# Altium PCB HighPower.PcbDoc
Units mil, origin at the board's own origin, x right, y up, seen from the top; angles counter-clockwise.
Board outline 2350.88 x 4143.89 mil, 2 copper layers (Top Layer, Bottom Layer); 8 components, 8 nets, 26 pads, 3 vias.
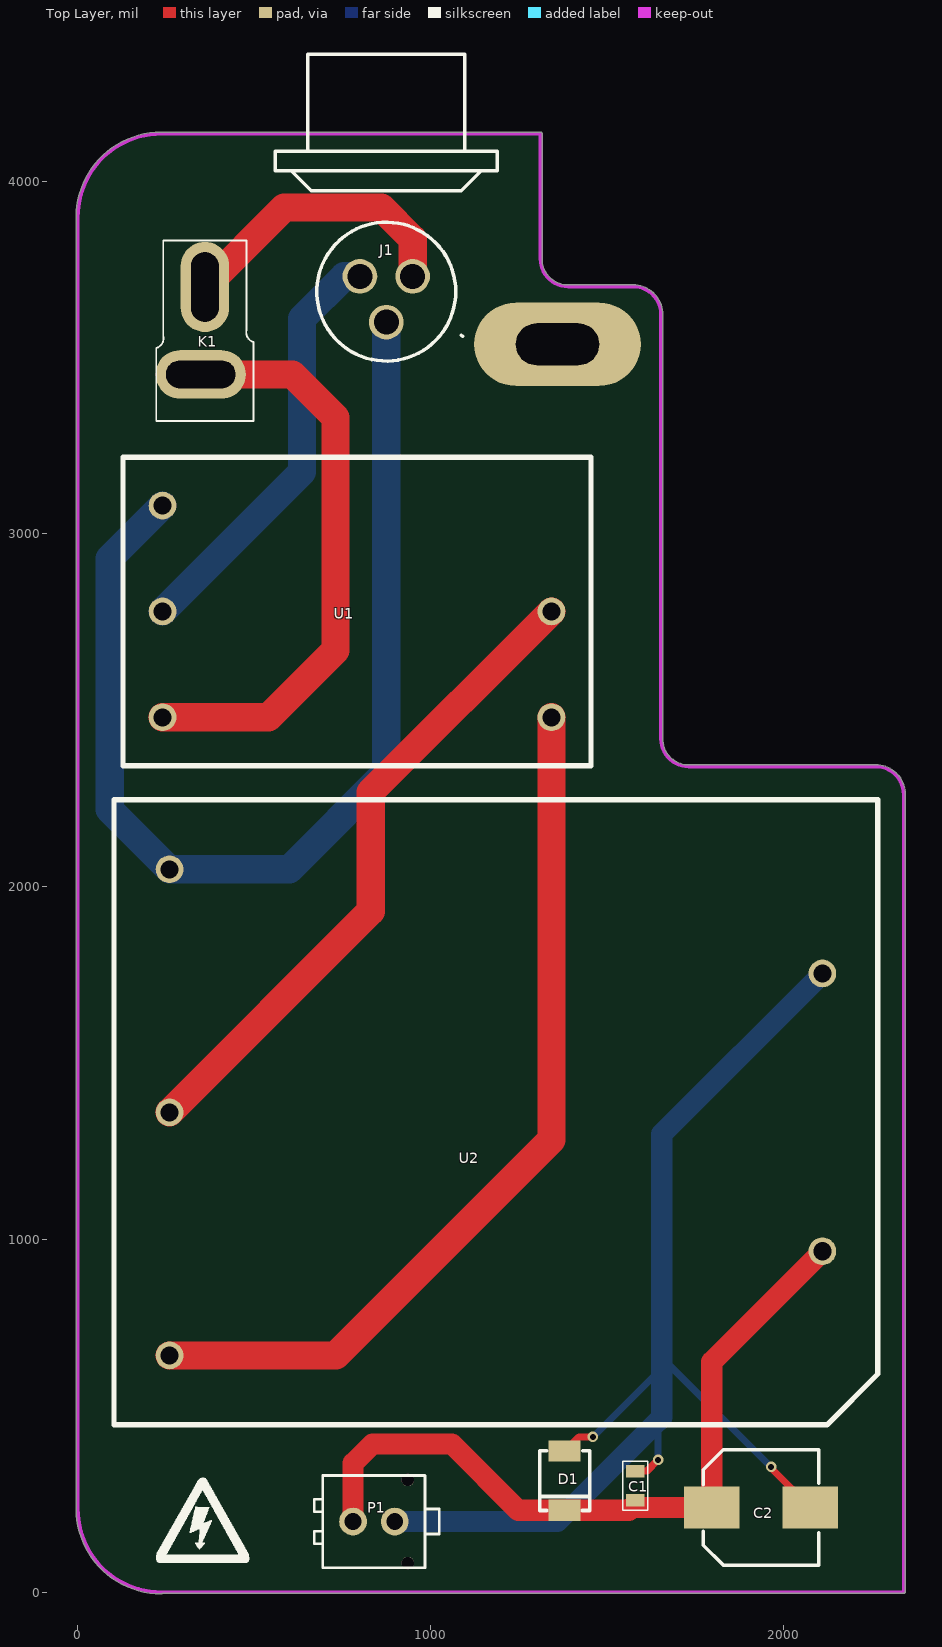
[diagram p0: Top Layer view]
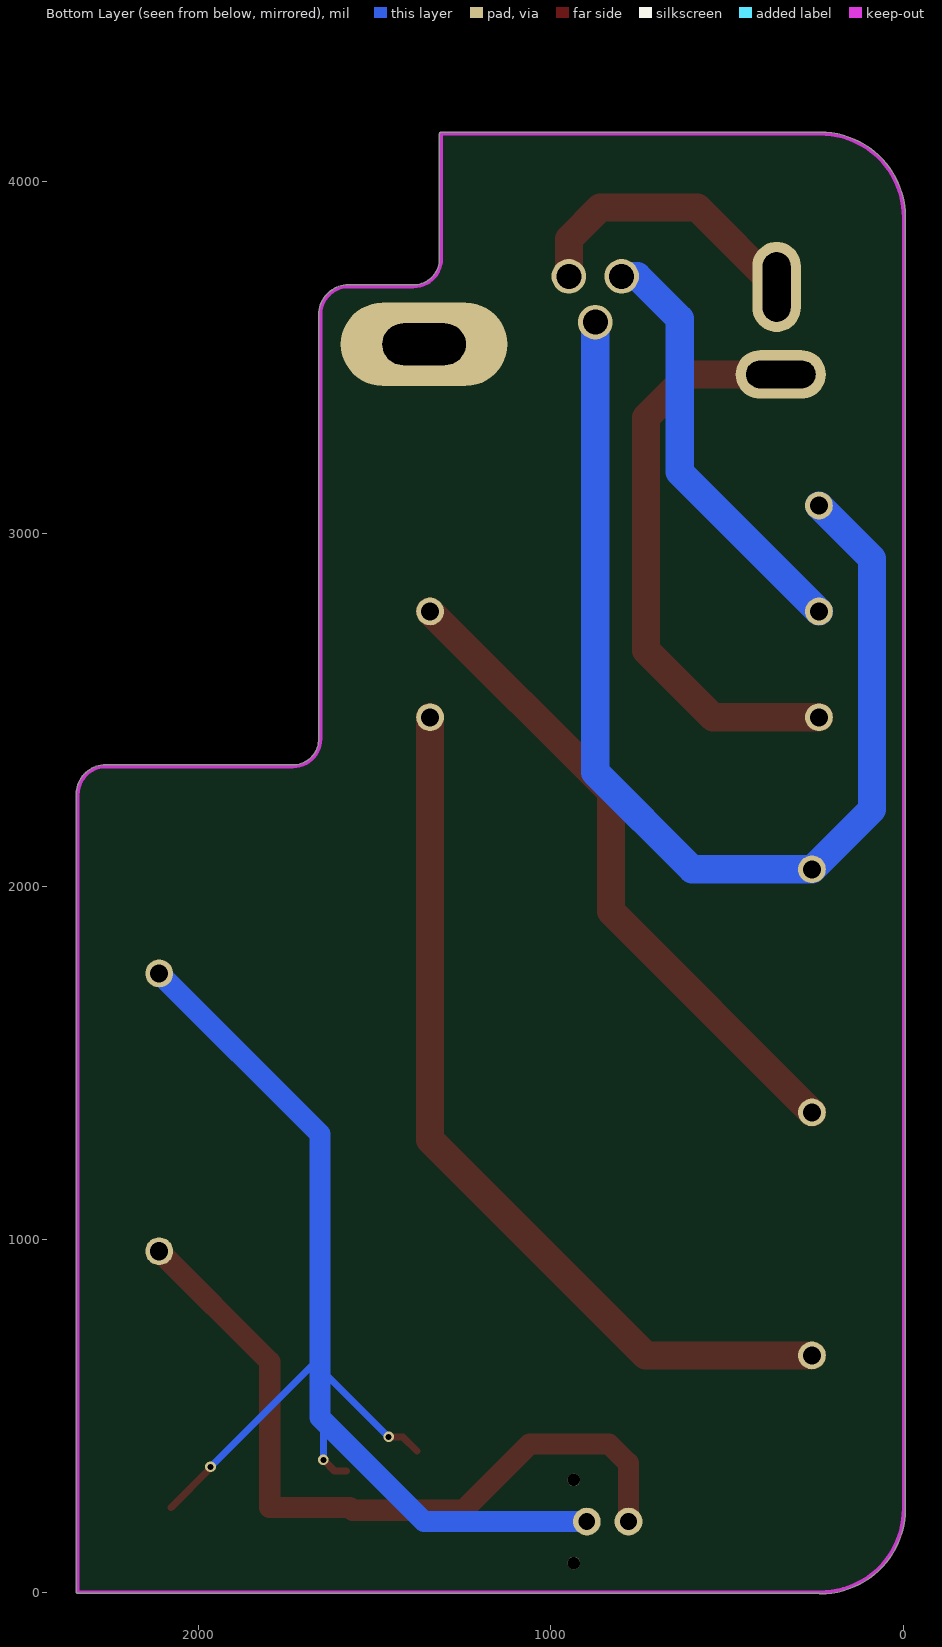
[diagram p1: Bottom Layer view, seen from below]

## Layer stack, top to bottom
Top Layer: signal copper 1.4
Dielectric: dielectric 12.6, FR-4, Dk 4.8
Bottom Layer: signal copper 1.4

## Board outline
-5.01,236.22 ccw(c236.22,236.22) 236.22,-5.02 ccw(c236.22,0) 239.23,-4.02 2340.85,-4.02 ccw(c2340.85,0) 2344.69,-1.18 ccw(c2340.85,2.05) 2345.87,2.05 2345.87,2261.31 ccw(c2262.11,2261.31) 2262.11,2345.06 1731.59,2345.06 cw(c1731.59,2418.79) 1657.87,2418.79 1657.87,3622.05 ccw(c1574.11,3622.05) 1574.11,3705.8 1389.59,3705.8 cw(c1389.59,3779.53) 1315.87,3779.53 1315.87,4133.86 ccw(c1310.85,4133.86) 1310.85,4138.87 236.22,4138.87 ccw(c236.22,3897.64) -5.01,3897.64

## Design rules (kind name [scope] priority, off if disabled: settings)
Clearance [All] p1: gap=10
HoleSize [All] p1: absolutevalues=TRUE maxlimit=800 minlimit=1 maxpercent=80.000 minpercent=20.000
PolygonConnect [All] p1: connectstyle=Relief reliefconductorwidth=10 reliefentries=4 polygonreliefangle="90 Angle"
RoutingVias [All] p1: holewidth=28 width=50 viastyle="Through Hole" minholewidth=28 minwidth=50 maxholewidth=28 maxwidth=50
SilkToSilkClearance [All] p1: silktosilkclearance=0
SilkscreenOverComponentPads [All] p1: minsilkscreentomaskgap=0
SolderMaskExpansion [All] p1: expansion=2
Width [All] p1: maxlimit=200 minlimit=10 preferedwidth=10
25 further rules are at their usual default settings.

## Components (designator, comment, footprint, x,y, rotation, side; value= is the part's Value field where it differs from the comment)
C1 "Capacitor-0805" 0805 1580,260 r90 top
C2 "电解电容" 贴片铝电容-8*10.3 2100,240 r180 top
D1 "SMBJ20A" SMBJ20A 1380,400 r270 top
J1 "三脚航空插头" 三脚航空插头 799.41,3730 r0 top
K1 "开关" T型接头 360,3700 r270 top
P1 "端子2" MOLEX-2 780,200 r270 top
U1 "FC-LX1D" FC-LX1D 240,2780 r0 top
U2 "LH10-10B15" LH10-10B15 260,1360 r0 top

## Footprints (in the part's own frame and the unit in brackets; to place one, negate y for a bottom-side part, rotate by r counter-clockwise, add the part's x,y. Pads: shape width x height; smd on the part's side, far side on the other; paste and mask are expansions set on the pad)
0805 [mm] "Chip Resistor, 2-Leads, Body 2.0x1.2mm, IPC Medium Density"
  rect 0.9x1.3 smd: 1(0,0) 2(2.1,0)
  silkscreen extent -0.7,-0.9 2.8,0.9, body extent 0.05,-0.6 2.05,0.6, height 0.5
FC-LX1D [mm]
  round 2 hole 1.3: 1(0,7.62) 2(0,0) 3(0,-7.62) 4(28,-7.62) 5(28,0)
  silkscreen extent -2.85,-11.1 30.85,11.1
LH10-10B15 [mm]
  round 2 hole 1.3: 1(0,17.5) 2(0,0) 3(0,-17.5) 4(47,10) 8(47,-10)
  silkscreen extent -4,-22.5 51,22.5
MOLEX-2 [mm]
  round 2 hole 1.2: 1(0,0) 2(0,3)
  round 0.9 hole 0.9: 2(-3,3.94) 2(3,3.94)
  silkscreen extent -3.32,-2.8 3.32,6.2
SMBJ20A [mm]
  rect 1.52x2.3 smd: 1(0,0) 2(4.27,0)
  silkscreen extent -0.02,-1.8 4.29,1.8
T型接头 [mm]
  oval 6.5x3.5 hole 2 slot 5 at 0 deg: 1(0,0)
  oval 3.5x6.5 hole 2 slot 5 at 90 deg: 2(6.3,-0.3)
  silkscreen extent -3.35,-3.5 9.65,3.5
三脚航空插头 [mm]
  round 2.5 hole 1.8: 1(3.8,0) 2(0,0) 3(1.9,-3.3)
  silkscreen extent -6.1,-6.1 9.9,16
贴片铝电容-8*10.3 [mm]
  rect 4x3 smd: 1(0.6,0) 2(7.7,0)
  silkscreen extent 0,-4.15 8.3,4.15

## Free pads (board coordinates)
  oval 472.44x236.22 hole 118.11 slot 236.22 at 0 deg: 0(1359.6,3537.45)

## Via types
v1: diameter 30, hole 17, Top Layer to Bottom Layer, 3 vias

## Nets (pads, with @x,y where several pads share a name; then routed paths per layer and width w, separated by ;. In a path a pad name is that pad's centre, name@x,y a point inside that pad or via, vN(x,y) a via of type N, cw(c..) or ccw(c..) an arc to the next point about the centre after c; other vN are vias at no path point)
GND: C1.2 C2.1 D1.1 P1.2@898.11,200 U2.4 | length 3451.3
  Top Layer w20: D1.1 1420,440 v1(1460,440) ; C1.2 1612.68,342.68 v1(1645,375) ; v1(1965,355) 1965,351.38 C2.1
  Bottom Layer w20: v1(1460,440) 1630,610 ; v1(1645,375) 1645,485 ; 1655,665 v1(1965,355)
  Bottom Layer w60: P1.2@898.11,200 1360,200 1645,485 1655,495 1655,665 1655,1298.31 U2.4
GND(AC): J1.3 U1.1 U2.1 | length 3167.7
  Bottom Layer w80: U1.1 90,2930 90,2218.98 U2.1 598.98,2048.98 874.21,2324.21 J1.3
NetJ1_1: J1.1 K1.1 | length 825.1
  Top Layer w80: K1.1 585,3925 860,3925 949.02,3835.98 J1.1
NetJ1_2: J1.2 U1.2 | length 1207.7
  Bottom Layer w80: U1.2 635,3175 635,3610 755,3730 J1.2
NetK1_2: K1.2 U1.3 | length 1661
  Top Layer w80: U1.3 540,2480 730,2670 730,3330 608.03,3451.97 K1.2
NetU1_4: U1.4 U2.3 | length 2533.2
  Top Layer w80: U2.3 731.02,671.02 1342.36,1282.36 U1.4
NetU1_5: U1.5 U2.2 | length 1868.3
  Top Layer w80: U2.2 830,1930 830,2267.64 U1.5
VCC15: C1.1 C2.2 D1.2 P1.1 U2.8 | length 2142.1
  Top Layer w60: P1.1 780,365 835,420 1060,420 1248.11,231.89 D1.2 1561.89,231.89 1570,240 C2.2 1796.85,652.76 U2.8
pads on no net: P1.2@935.12,81.89 P1.2@935.12,318.11

## Keep-outs
Keep-Out Layer:
  lines w8: 238.27,0 2340.85,0
  lines w10: 236.22,0 cw(c236.22,236.22) 0,236.22 0,3897.64 cw(c236.22,3897.64) 236.22,4133.86 1310.85,4133.86 1310.85,3779.53 ccw(c1389.59,3779.53) 1389.59,3700.79 1574.11,3700.79 cw(c1574.11,3622.05) 1652.85,3622.05 1652.85,2418.79 ccw(c1731.59,2418.79) 1731.59,2340.05 2262.11,2340.05 cw(c2262.11,2261.31) 2340.85,2261.31 2340.85,2.05

## Silkscreen, mask and mechanical layers (free items; w line width, h text height)
Top Overlay:
  drawing of 568 lines, arcs and shapes, not listed